# EAGLE board voltage regulator (EAGLE 6.1)
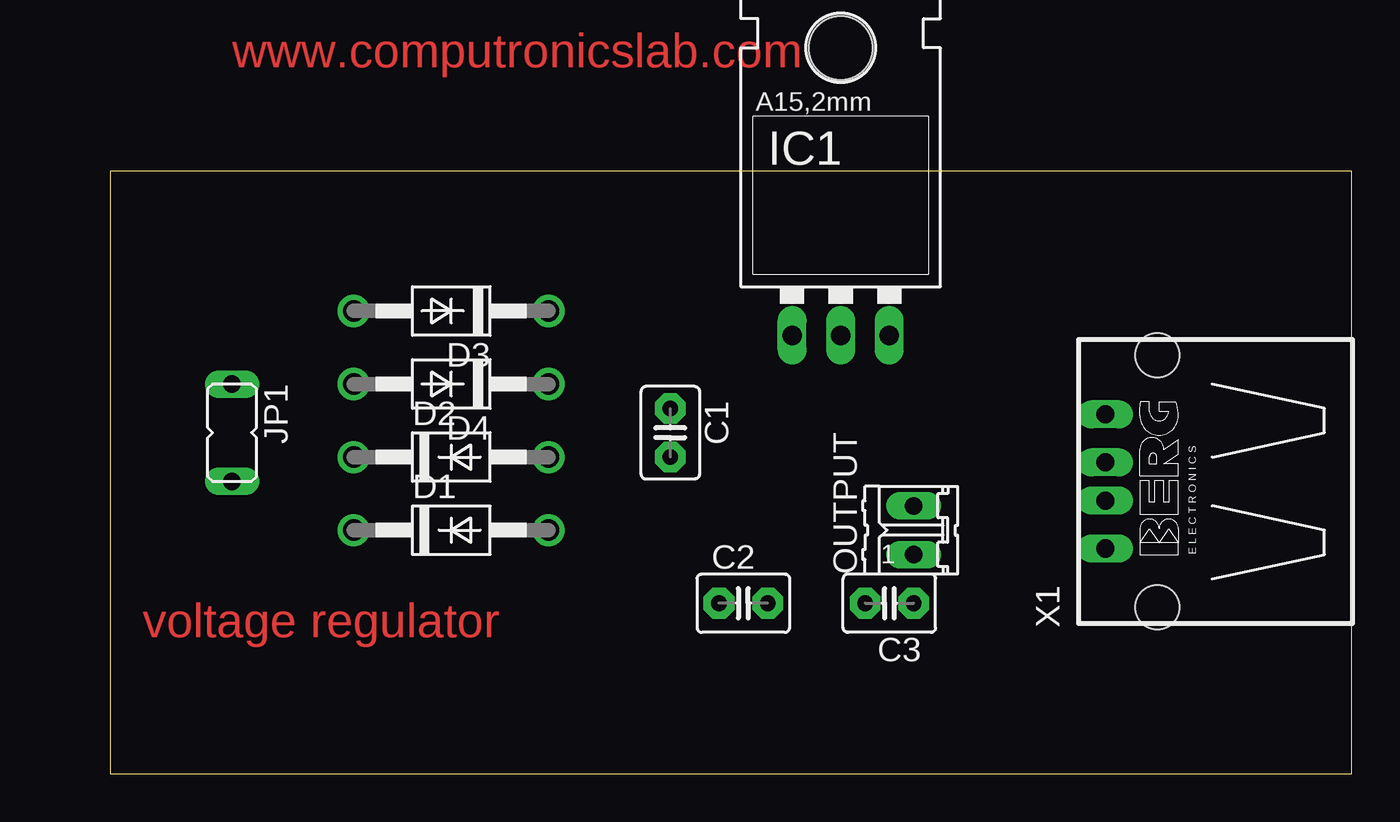
[diagram p0: board, top side]
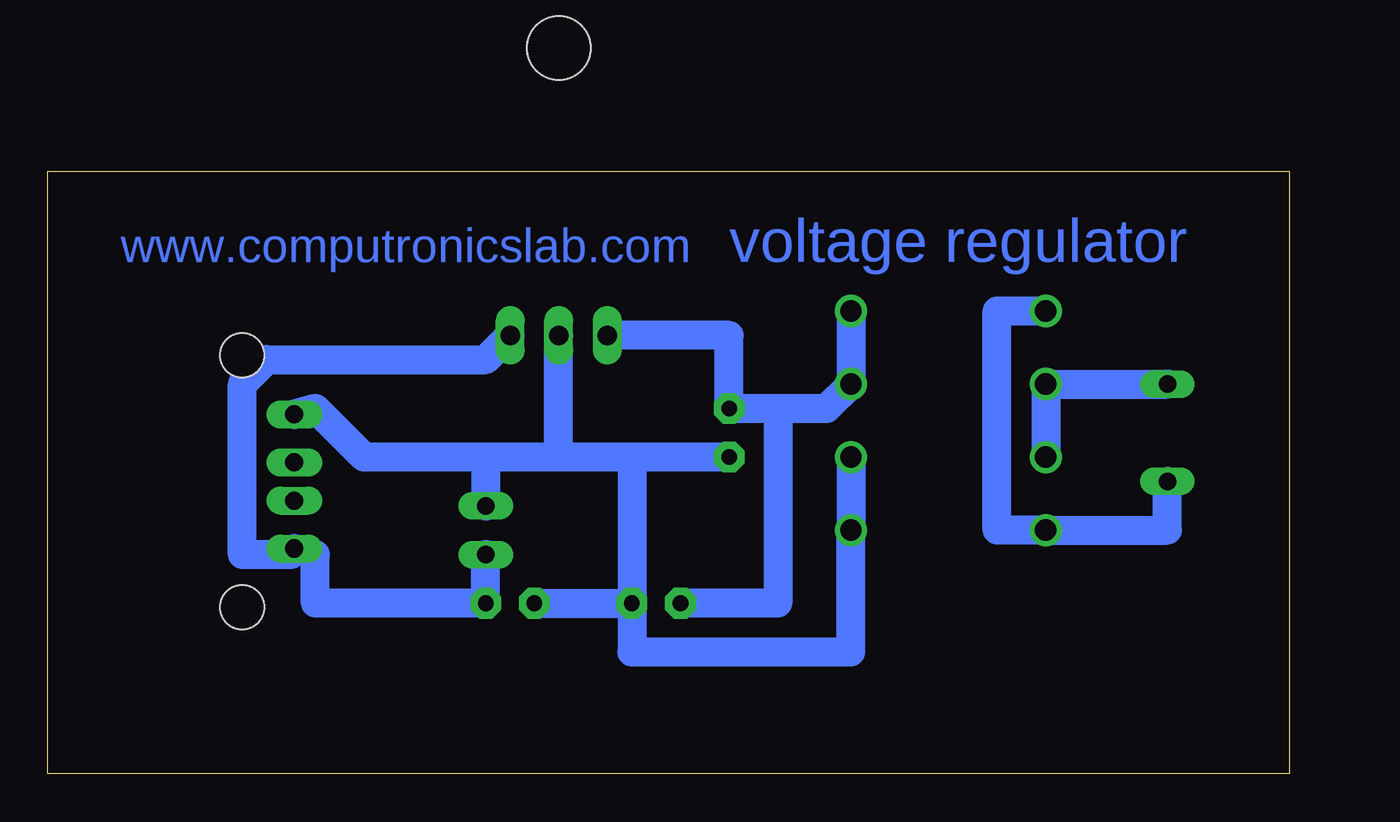
[diagram p1: board, bottom side, seen from below]

Size 64.75 x 31.42 mm. Coordinates in mm from the lower left corner, seen from the top.
Outline: 0,0 64.75,0 64.75,31.42 0,31.42 0,0
Copper layers (1*16): Top 0.035mm / dielectric 1.5mm / Bottom 0.035mm
Design rules: minimum track width 60mil, minimum drill 24mil, track to track 8mil, track to pad 8mil, pad to pad 8mil, via to via 8mil, smd to smd 8mil, copper to edge 40mil, drill to drill 8mil, minimum pad ring 10mil, minimum via ring 8mil, stop-mask expansion 4mil, vias tented up to drill 0mil, thermal gap 10mil

## Footprints (pad centres in the part's own frame; a part is rotated, then mirrored left to right if it is on the bottom)
C2.5-3 = drill 0.813 pad 1.6 octagon: 1 -1.27,0; 2 1.27,0
DO41-10 = drill 1.118: A 5.08,0; C -5.08,0
78XXL = drill 1.016 long: GND 0,-3.81; IN -2.54,-3.81; OUT 2.54,-3.81 | hole 3.302: 0,11.176
JP1 = drill 0.914 long: 1 0,-2.54; 2 0,2.54
02P = drill 0.914 long: 1 -1.27,0; 2 1.27,0
PN87520 = drill 0.95 long: 1 -3.5,2.71; 2 -1,2.71; 3 1,2.71; 4 3.5,2.71 | hole 2.3: -6.57,0; 6.57,0

## Placement (x,y rotation side)
C1  47uf  [C2.5-3]  29.21,17.78 270 top
C2  0.1uf  [C2.5-3]  33.02,8.89 0 top
C3  0.1uf  [C2.5-3]  40.64,8.89 180 top
D1  1N4007  [DO41-10]  17.78,12.7 0 top
D2  1N4007  [DO41-10]  17.78,16.51 0 top
D3  1N4007  [DO41-10]  17.78,24.13 180 top
D4  1N4007  [DO41-10]  17.78,20.32 180 top
IC1  7805  [78XXL]  38.1,26.67 0 top
JP1  transformer  [JP1]  6.35,17.78 180 top
OUTPUT  [02P]  41.91,12.7 90 top
X1  [PN87520]  54.61,15.24 90 top

## Library data of the parts
C1-C3 = capacitor-wima
D1-D4 = diode
IC1 = v-reg
JP1 = jumper
OUTPUT = con-amp-quick; OC_FARNELL: unknown; OC_NEWARK: unknown
X1 = con-berg; OC_FARNELL: unknown; OC_NEWARK: unknown

## Nets
N$1: C1.2 C2.2 C3.2 D1.A D2.A IC1.GND OUTPUT.2 X1.4
N$2: C1.1 C2.1 D3.C D4.C IC1.IN
N$3: D2.C D4.A JP1.1
N$4: D1.C D3.A JP1.2
N$5: C3.1 IC1.OUT OUTPUT.1 X1.1

## Tracks (layer width: path | path; a pad name or v marks a point on that pad's centre or on a via)
N$1
  Bottom 1.524: D2.A D1.A 22.86,6.35 34.29,6.35 C2.2 | C3.2 C2.2 | C1.2 34.29,16.51 | 34.29,16.51 38.1,16.51 | 38.1,16.51 41.91,16.51 | 41.91,16.51 48.26,16.51 50.8,19.05 X1.4 | 38.1,16.51 IC1.GND | 34.29,16.51 C2.2 | 41.91,16.51 OUTPUT.2
N$2
  Bottom 1.524: D3.C D4.C 24.13,19.05 26.67,19.05 | IC1.IN 29.21,22.86 C1.1 26.67,19.05 | C2.1 26.67,8.89 26.67,19.05
N$3
  Bottom 1.524: JP1.1 D4.A D2.C
N$4
  Bottom 1.524: JP1.2 6.35,12.7 D1.C 15.24,12.7 15.24,24.13 D3.A
N$5
  Bottom 1.524: IC1.OUT 41.91,21.59 53.34,21.59 54.61,20.32 54.61,11.43 52.07,11.43 X1.1 50.8,11.43 50.8,8.89 C3.1 OUTPUT.1

## Text on the board
Top: www.computronicslab.com | voltage regulator
Bottom: voltage regulator | www.computronicslab.com